# Altium PCB 917S001(ZHTH-010)-F.PcbDoc (part 2 of 2)
Units mm, origin at the board's own origin, x right, y up, seen from the top; angles counter-clockwise.
Board outline 77.5 x 39.1 mm, 2 copper layers (Top Layer, Bottom Layer), stack 0.325 mm thick; 174 components, 101 nets, 467 pads, 299 vias.
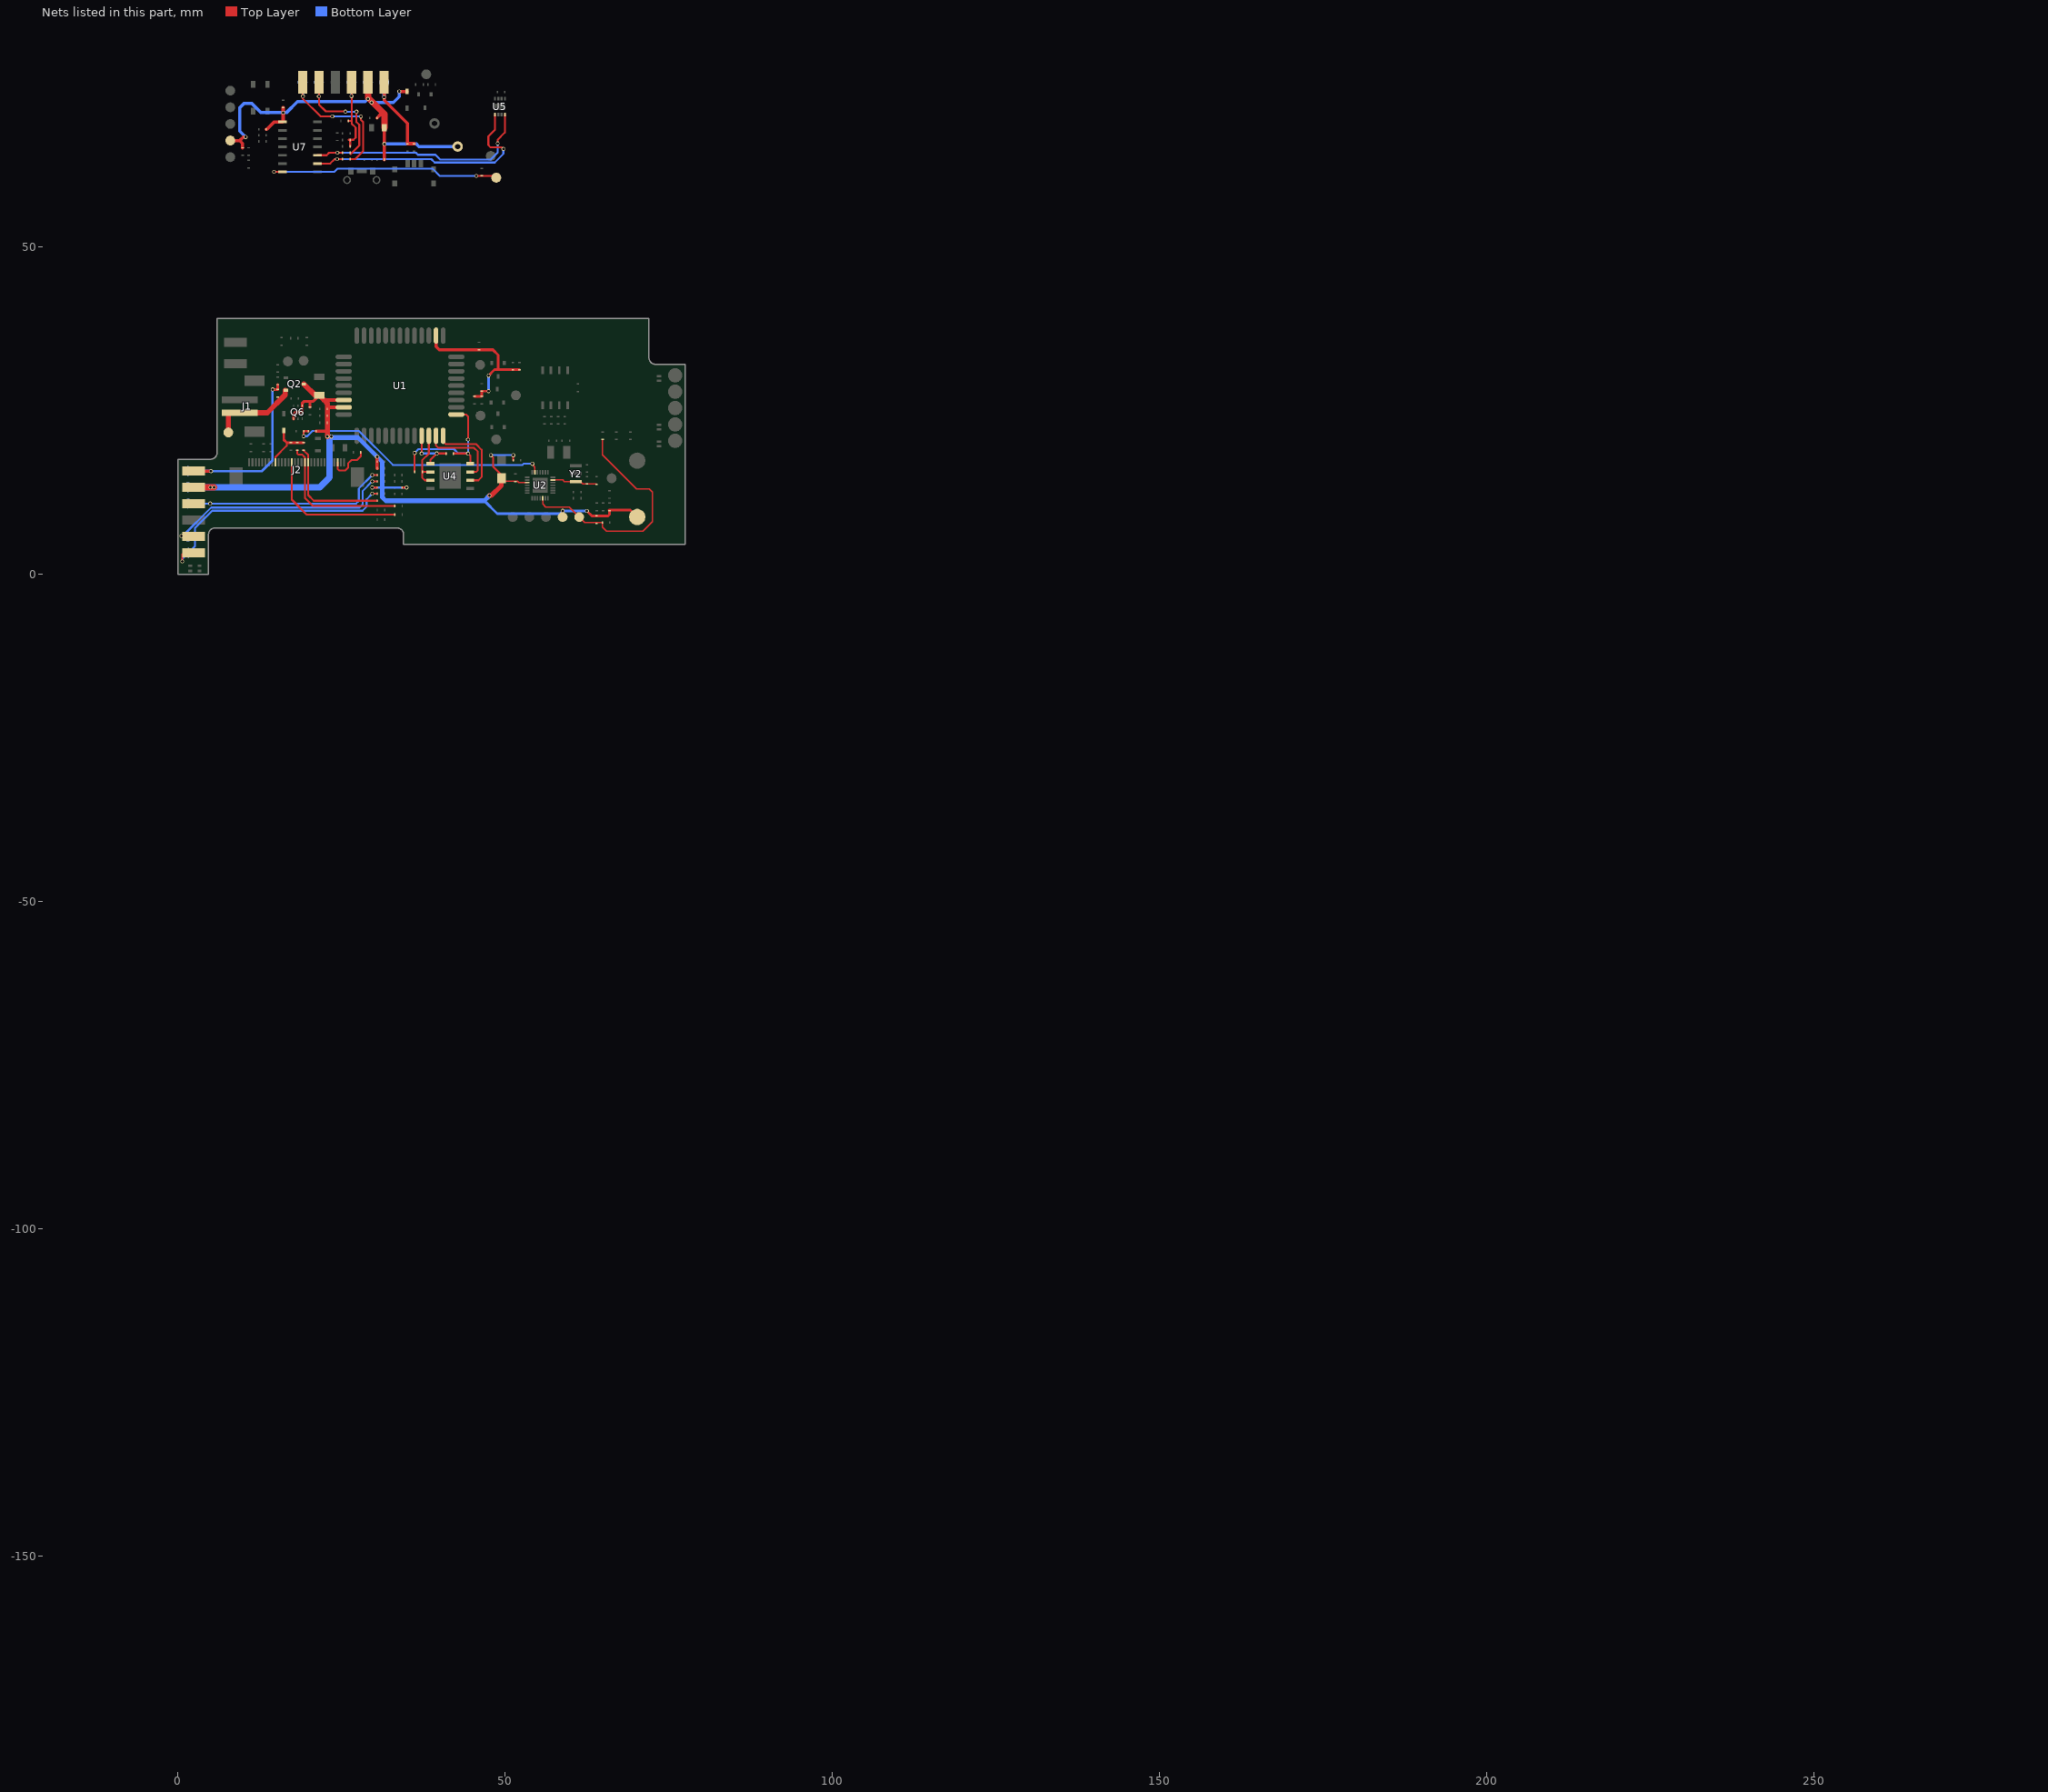
[diagram p2: the nets of this part, all layers, seen from the top]

## Via types
v1: diameter 0.6, hole 0.4, Top Layer to Bottom Layer, tented both sides, 299 vias

## Nets (pads, with @x,y where several pads share a name; then routed paths per layer and width w, separated by ;. In a path a pad name is that pad's centre, name@x,y a point inside that pad or via, vN(x,y) a via of type N, cw(c..) or ccw(c..) an arc to the next point about the centre after c; other vN are vias at no path point) (continued)
OLED_VDD: C12.2 D4.2 J2.22 R42.1 R43.1 | length 8.3
  Top Layer w0.3: J2.22@14.911,17.096 14.911,17.909 16.637,19.634 16.637,20.117
  Top Layer w0.4: D4.2@16.205,21.976 16.205,20.549 16.637,20.117 R43.1@19.202,20.117
OLED_VDD_EN: R7.1 R8.2 U2.13 | length 40.3
  Top Layer w0.2: v1@54.254,16.713 54.572,16.396 U2.13@54.572,15.564
  Top Layer w0.3: v1(19.228,21.107) 19.228,21.864 R8.2@19.233,21.869 R7.1@19.962,21.869
  Bottom Layer w0.3: v1(19.228,21.107) 19.787,21.107 20.599,21.92 27.661,21.92 32.858,16.723 52.664,16.723 52.832,16.891 v1(54.178,16.891)
R\E\S\: J2.17 R24.1 | length 22.4
  Top Layer w0.3: J2.17@17.411,17.096 17.411,11.418 19.71,9.119 R24.1@33.147,9.119
SCL: R23.1 U5.4 U7.10 | length 35.6
  Top Layer w0.3: U7.10@21.336,64.033 22.733,64.033 23.127,64.427 v1(24.384,64.427) R23.1@25.19,64.427 ; v1(48.882,65.837) 48.882,66.408 49.975,67.501 U5.4@49.975,70.225
  Bottom Layer w0.3: v1(24.384,64.427) 36.369,64.427 36.685,64.111 39.368,64.111 40.107,63.373 47.803,63.373 48.882,64.453 v1(48.882,65.837)
SCLK: J2.13 R17.1 R42.2 | length 22.3
  Top Layer w0.3: R42.2@18.237,18.976 18.237,18.466 18.39,18.313 18.974,18.313 19.411,17.876 J2.13@19.411,17.096 19.411,11.704 20.65,10.465 R17.1@33.147,10.465
SDA: R25.1 U5.1 U7.9 | length 38.7
  Top Layer w0.3: U7.9@21.336,62.763 23.292,62.763 23.978,63.449 v1(24.333,63.449) R25.1@25.19,63.449 ; U5.1@48.475,70.225 48.475,67.93 47.457,66.912 47.457,65.588 47.808,65.237 49.52,65.237 v1(49.759,64.999)
  Bottom Layer w0.3: v1(24.333,63.449) 38.735,63.449 39.261,62.923 48.42,62.923 49.759,64.262 v1(49.759,64.999)
SDIN: J2.12 R20.1 R43.2 | length 18.1
  Top Layer w0.3: R43.2@19.202,18.967 19.911,18.258 J2.12@19.911,17.096 19.911,12.118 20.777,11.252 R20.1@30.479,11.252
SHT31_VCC: R41.2 T27.1 U7.7 | length 36
  Top Layer w0.3: v1(14.707,61.493) U7.7@16.002,61.493 ; v1(45.618,60.884) R41.2@46.457,60.884 47.992,60.884 cw(c47.992,59.93) T27.1@48.666,60.604
  Bottom Layer w0.3: v1(14.707,61.493) 23.927,61.493 24.435,62.001 38.913,62.001 40.03,60.884 v1(45.618,60.884)
SHT_ALERT: P8.1 R37.1 T40.1 | length 31.8
  Top Layer w0.3: v1@29.737,15.183 R37.1@30.479,15.183
  Bottom Layer w0.3: T40.1@1.575,10.82 v1(4.953,10.82) 27.254,10.82 27.661,11.227 27.661,13.106 v1(29.718,15.164)
SHT_ALERT_S: P7.1 R40.2 R47.2 R48.2 T33.1 | length 13.1
  Top Layer w0.3: R40.2@26.067,69.291 26.521,69.291 ; 26.137,66.396 26.822,66.396 27.178,66.751 27.178,68.25 26.572,68.856 P7.1@26.572,75.159 ; R47.2@26.34,65.405 R48.2@26.34,66.192
  Bottom Layer w0.3: v1(26.543,73.076) T33.1@26.543,75.129
SHT_SCL: P4.1 R35.1 T32.1 | length 35.5
  Top Layer w0.3: P4.1@2.718,5.799 P4.1@3.64,5.799 ; v1@29.729,14.226 R35.1@30.479,14.226
  Bottom Layer w0.3: v1(0.533,5.867) 0.762,5.867 5.105,10.211 27.762,10.211 28.27,10.719 28.27,12.768 v1(29.718,14.216)
SHT_SCL_S: P3.1 R23.2 T34.1 | length 18.9
  Top Layer w0.3: P3.1@21.572,75.159 v1(21.572,73.025) 21.572,71.773 22.619,70.726 25.566,70.726 v1(25.603,70.688) ; 26.416,64.211 27.737,65.532 27.737,68.682 27.305,69.113 v1(27.305,70.688)
  Bottom Layer w0.3: v1(21.572,73.025) T34.1@21.572,75.159 ; v1(25.603,70.688) v1(27.305,70.688)
SHT_SDA: P2.1 R36.1 T36.1 | length 37.7
  Top Layer w0.3: v1(0.686,1.981) P2.1@0.686,3.073 ; v1@29.724,12.313 R36.1@30.479,12.313
  Bottom Layer w0.3: v1(0.686,1.981) 0.686,2.362 T36.1@1.626,3.302 2.616,4.293 2.616,7.085 5.259,9.728 28.219,9.728 28.854,10.363 28.854,11.455 v1(29.718,12.319)
SHT_SDA_S: P1.1 R25.2 T31.1 | length 22.5
  Top Layer w0.3: P1.1@19.072,75.159 19.072,72.717 21.814,69.976 v1(23.618,69.976) ; R25.2@26.34,63.449 27.127,63.449 28.321,64.643 28.321,69.088 27.965,69.444 v1(27.965,69.952)
  Bottom Layer w0.3: v1(19.126,73.05) T31.1@19.126,75.105 ; v1(23.618,69.976) 27.941,69.976 v1(27.965,69.952)
SIM_GND: C34.2 U1.10 U4.1 | length 8.4
  Top Layer w0.3: v1(37.262,18.466) U1.10@37.262,21.177 ; U4.1@38.608,16.916 38.608,17.501 v1(39.573,18.466) C34.2@40.989,18.466
  Bottom Layer w0.3: v1(37.262,18.466) v1(39.573,18.466)
TEM_OUT: C38.1 R59.1 U2.6 Y2.1 | length 6.9
  Top Layer w0.2: U2.6@57.322,14.414 58.839,14.414 59.081,14.173 Y2.1@60.845,14.173 61.494,14.173 61.874,13.792 C38.1@62.535,13.792 R59.1@63.966,13.792
USIM_CLK: U1.13 U4.6 | length 13.4
  Top Layer w0.3: U1.13@40.56,21.179 40.56,20.273 40.919,19.914 45.542,19.914 46.431,19.025 46.431,14.884 45.923,14.376 U4.6@44.704,14.376
USIM_DATA: R34.1 U1.11 U4.2 U4.3 | length 9.5
  Top Layer w0.3: R34.1@37.363,15.646 U4.2@38.608,15.646 ; U1.11@38.36,21.179 38.36,18.446 37.338,17.424 37.338,14.808 37.77,14.376 U4.3@38.608,14.376
USIM_RST: U1.12 U4.7 | length 12.4
  Top Layer w0.3: U1.12@39.46,21.179 39.46,19.671 39.802,19.329 45.263,19.329 45.847,18.745 45.847,15.9 45.593,15.646 U4.7@44.704,15.646
USIM_VDD: C34.1 R34.2 U1.14 U4.8 | length 23
  Top Layer w0.3: R34.2@36.195,15.646 v1(36.195,18.542) ; C34.1@42.139,18.466 v1(44.348,18.466) 44.704,18.11 U4.8@44.704,16.916 ; U1.14@42.56,24.429 44.049,24.429 44.348,24.13 v1(44.348,20.599)
  Bottom Layer w0.3: v1(36.195,18.542) 36.779,19.126 42.215,19.126 42.875,18.466 v1(44.348,18.466) v1(44.348,20.599)
VBAT: C1.1 C3.1 C4.1 C5.1 C14.2 C15.1 C16.1 C35.1 P10.1 Q2.D Q6.1 Q6.4 R2.2 R5.2 R7.2 R11.2 R19.1 R32.1 R33.1 T1.1 T25.1 T44.1 U1.42 U1.43 U2.17 | length 138.8
  Top Layer w0.2: C15.1@49.784,14.249 51.9,14.249 52.135,14.014 U2.17@53.422,14.014
  Top Layer w0.3: v1@29.72,13.269 R32.1@30.479,13.269 ; R33.1@34.29,13.258 v1(34.95,13.259) ; v1(47.854,18.212) 48.209,17.856 48.209,16.434 49.479,15.164 C15.1@49.479,14.707 ; R19.1@51.257,17.424 v1(51.257,18.212)
  Top Layer w0.4: T44.1@58.801,8.213 v1(58.801,9.703) ; v1(62.509,9.677) 63.239,8.948 R5.2@63.983,8.948 65.768,8.948 65.964,9.144 R2.2@65.964,9.754 ; R2.2@65.913,9.83 69.139,9.83 T25.1@70.206,8.763
  Top Layer w0.45: Q6.4@17.705,23.768 17.705,24.487 17.958,24.74 18.771,24.74 19.005,24.974 Q6.1@19.005,25.768 19.005,26.117 19.329,26.441 20.193,26.441 ; R11.2@20.193,25.534 20.193,26.441 ; C1.1@21.615,27.356 20.701,26.441 20.193,26.441
  Top Layer w0.5: R7.2@21.112,21.869 22.606,21.869 ; v1(30.455,17.958) 30.455,16.224 C14.2@30.473,16.205
  Top Layer w0.6: 22.342,26.629 U1.42@25.36,26.629 ; 22.887,25.529 U1.43@25.36,25.529
  Top Layer w0.7: v1(47.625,12.04) 47.904,12.04 49.454,13.589 C15.1@49.454,14.707
  Top Layer w0.8: Q2.D@19.267,29.073 20.984,27.356 C1.1@21.615,27.356 22.342,26.629 22.86,26.111 v1(22.86,21.066)
  Top Layer w1: P10.1@2.718,13.299 5.526,13.299 v1(5.537,13.31)
  Bottom Layer w0.3: v1(29.718,13.267) 31.267,13.267 v1@34.942,13.267 ; v1(47.854,18.212) v1(51.257,18.212)
  Bottom Layer w0.4: 46.838,11.252 48.808,9.281 58.38,9.281 v1(58.801,9.703) 62.484,9.703 v1(62.509,9.677)
  Bottom Layer w0.7: 23.19,20.904 27.508,20.904 31.267,17.145 31.267,13.267 31.267,11.76 31.775,11.252 46.838,11.252 v1(47.625,12.04)
  Bottom Layer w1: T1.1@1.549,13.31 v1(4.978,13.31) 21.692,13.31 23.19,14.808 23.19,20.904
  other v1: 23.47,21.066
VBAT_CTL: P12.1 R49.1 R51.1 T8.1 | length 28.3
  Top Layer w0.4: v1(14.503,28.245) 15.272,28.245 R49.1@15.291,28.263 R51.1@15.291,28.996
  Top Layer w0.5: P12.1@2.718,15.799 2.921,15.799 2.946,15.773 v1(5.08,15.773)
  Bottom Layer w0.4: v1(5.08,15.773) 12.827,15.773 14.464,17.41 14.464,28.205 v1(14.503,28.245)
  Bottom Layer w0.5: T8.1@1.575,15.773 v1(5.08,15.773)
VBAT_CTL_S: C13.2 P11.1 R52.2 T43.1 | length 14.1
  Top Layer w0.5: P11.1@31.547,75.184 31.547,72.441 35.102,68.886 C13.2@35.102,65.799 R52.2@36.113,65.799
  Bottom Layer w0.5: v1(31.521,72.923) T43.1@31.521,75.159
VBAT_IN: J1.2 Q2.S R49.2 T42.1 | length 13.4
  Top Layer w0.8: T42.1@7.722,21.692 7.722,24.46 7.941,24.679 J1.2@9.474,24.679 13.656,24.679 16.408,27.432 Q2.S@16.408,28.123
VBAT_S: C20.1 C33.1 C45.1 D2.2 LS1.1 P9.1 R14.1 R31.1 R38.1 T21.1 T41.1 U7.1 | length 70.4
  Top Layer w0.5: T41.1@8.026,66.279 9.463,66.279 ; R14.1@9.906,65.176 9.906,65.837 9.463,66.279 ; v1(10.363,66.827) 10.011,66.827 9.463,66.279 ; R31.1@13.525,67.998 13.591,67.998 14.707,69.113 U7.1@16.002,69.113 ; U7.1@16.104,69.215 v1(16.104,70.536) C45.1@16.104,71.298 ; C20.1@30.455,69.723 31.039,70.307 31.572,70.307 ; R38.1@31.572,63.373 C33.1@31.572,68.224 ; v1(33.853,73.782) D2.2@35.001,73.782
  Top Layer w1: P9.1@29.072,75.159 29.072,72.807 31.572,70.307 C33.1@31.572,68.224
  Bottom Layer w0.5: v1(10.363,66.827) 9.474,67.716 9.474,71.298 10.135,71.958 11.303,71.958 12.725,70.536 v1(16.104,70.536) 16.586,70.536 18.276,72.226 28.639,72.226 v1(29.058,72.644) ; T21.1@29.058,75.159 v1(29.058,72.644) ; v1(31.572,65.761) 36.45,65.761 36.846,65.364 LS1.1@42.763,65.364 ; v1(33.853,73.782) 33.853,72.994 32.944,72.085 v1(29.616,72.085) v1(29.058,72.644)
VCC: C10.1 J2.3 | length 6.5
  Top Layer w0.3: J2.3@24.411,17.096 24.411,16.127 24.663,15.875 25.603,15.875 26.01,16.281 26.01,16.942 26.518,17.45 27.356,17.45 27.965,18.059 C10.1@27.965,18.644
VDD_EXT: C17.2 C18.2 C19.2 R9.2 R10.1 R22.2 U1.24 | length 24.4
  Top Layer w0.4: C18.2@45.314,27.21 R9.2@46.457,27.21 R22.2@46.457,27.984 v1(47.491,27.984) ; v1(47.491,30.36) 48.398,31.267 48.946,31.267 ; 48.158,34.315 48.946,33.528 48.946,31.267 ; C19.2@52.222,31.267 48.946,31.267
  Top Layer w0.5: U1.24@39.46,36.479 39.46,34.81 39.954,34.315 48.158,34.315
  Bottom Layer w0.4: v1(47.491,27.984) v1(47.491,30.36)
VPP: C8.1 R5.1 R56.1 T4.1 U2.26 | length 37.2
  Top Layer w0.2: U2.26@55.772,11.664 55.772,10.751 56.21,10.312 59.792,10.312 T4.1@61.341,8.763 62.179,7.925 C8.1@64.872,7.925 64.872,7.239 65.481,6.629 71.069,6.629 72.517,8.077 72.517,12.598 72.034,13.081 70.129,13.081 64.922,18.288 R56.1@64.922,20.609
pads on no net: J2.6 J2.7 J2.8 J2.9 J2.10 J2.11 J2.14 J2.15 J2.19 J2.24 K1. K2.3 K2.4 K2.5 S1.0 S1.3 T544.1 U1.2 U1.3 U1.4 U1.5 U1.6 U1.7 U1.8 U1.9 U1.16 U1.19 U1.21 U1.22 U1.23 U1.25 U1.26 U1.28 U1.29 U1.30 U1.31 U1.32 U1.33 U1.44 U1.45 U1.46 U1.47 U1.48 U1.49 U1.50 U1.51 U1.52 U1.53 U1.54 U1.55 U1.56 U1.57 U1.58 U2.4 U3. U4.0 U4.4 U4.5 U5.6 U7.
copper on no net: | length 1
  Top Layer w0.254: 51.181,8.763 51.333,8.763 51.41,8.763 ; 51.486,8.179 51.486,8.865 ; 54.026,8.458 54.077,8.458

## Polygon pours and split planes (outlines as drawn)
GND on Top Layer "Bottom Layer-No Net" (solid, remove dead copper, pour order 48): 0.025,0 -0.305,0.33 -0.305,35.992 0.279,35.992 4.826,40.538 6.833,42.545 73.533,42.545 75.336,42.545 83.007,34.874 81.788,33.655 81.788,-1.118
GND_S on Top Layer "Bottom Layer-No Net" (solid, remove dead copper, pour order 26): 3.124,77.924 3.124,63.424 5.624,63.424 5.624,59.424 40.589,59.424 40.411,59.424 40.194,59.641 40.194,67.424 40.194,74.424 40.157,74.461 40.157,77.978
GND on Bottom Layer "Bottom Layer-No Net" (solid, remove dead copper, pour order 46): 0.229,0.025 0.457,0.254 4.597,0.254 4.597,4.826 6.071,6.299 7.899,4.47 34.773,4.47 77.343,4.47 77.572,4.699 77.876,5.004 77.876,37.871 73.838,37.871 72.619,39.091 72.492,38.964 5.766,38.964 5.766,23.419 -0.051,17.602
GND_S on Bottom Layer "Bottom Layer-No Net" (solid, remove dead copper, pour order 28): 3.124,77.924 3.124,63.424 5.624,63.424 5.624,59.424 40.157,59.424 40.157,67.476 40.194,67.513 40.208,67.527 40.208,77.924

## Keep-outs
Keep-Out Layer:
  circle w0.006: c-15.334,0 r0.003
  circle w0.006: c0,0 r0.003
  circle w0.006: c6,39.1 r0.003
  circle w0.006: c85.568,39.1 r0.003
  circle w0.006: c72,39.1 r0.003
  circle w0.006: c77.5,4.6 r0.003
  circle w0.013: c76,30.4 r1.1
  circle w0.013: c76,27.9 r1.1
  circle w0.013: c76,25.4 r1.1
  circle w0.013: c76,22.9 r1.1
  circle w0.013: c76,20.4 r1.1
  circle w0.006: c4.7,-10.517 r0.003
  circle w0.006: c4.7,0 r0.003
  circle w0.006: c0,0 r0.003
  circle w0.006: c77.5,-20.328 r0.003
  circle w0.006: c77.5,4.6 r0.003
  circle w0.006: c0,0 r0.003
  circle w0.013: c34.3,18.55 r0.7
  circle w0.013: c44.4,37.1 r0.7
  circle w0.006: c6,48.24 r0.003
  circle w0.006: c6,39.1 r0.003
  circle w0.006: c72,39.1 r0.003
  circle w0.006: c246.233,-118.082 r0.003
  circle w0.006: c180.233,-118.082 r0.003
  circle w0.006: c180.233,-108.943 r0.003
  circle w0.013: c186.133,-130.482 r0.71
  circle w0.013: c186.133,-132.482 r0.71
  circle w0.013: c218.633,-120.082 r0.7
  circle w0.013: c208.533,-138.632 r0.7
  circle w0.006: c174.233,-157.182 r0.003
  circle w0.006: c251.733,-152.582 r0.003
  circle w0.006: c251.733,-177.511 r0.003
  circle w0.006: c174.233,-157.182 r0.003
  circle w0.006: c178.933,-157.182 r0.003
  circle w0.006: c178.933,-167.7 r0.003
  circle w0.013: c250.233,-136.782 r1.1
  circle w0.013: c250.233,-134.282 r1.1
  circle w0.013: c250.233,-131.782 r1.1
  circle w0.013: c250.233,-129.282 r1.1
  circle w0.013: c250.233,-126.782 r1.1
  circle w0.006: c251.733,-152.582 r0.003
  circle w0.006: c246.233,-118.082 r0.003
  circle w0.006: c259.802,-118.082 r0.003
  circle w0.006: c180.233,-118.082 r0.003
  circle w0.006: c174.233,-157.182 r0.003
  circle w0.006: c158.9,-157.182 r0.003
  circle w0.006: c265.791,-77.417 r0.003
  circle w0.006: c199.791,-77.417 r0.003
  circle w0.006: c199.791,-68.277 r0.003
  circle w0.013: c205.691,-89.817 r0.71
  circle w0.013: c205.691,-91.817 r0.71
  circle w0.013: c238.191,-79.417 r0.7
  circle w0.013: c228.091,-97.967 r0.7
  circle w0.006: c193.791,-116.517 r0.003
  circle w0.006: c271.291,-111.917 r0.003
  circle w0.006: c271.291,-136.845 r0.003
  circle w0.006: c193.791,-116.517 r0.003
  circle w0.006: c198.491,-116.517 r0.003
  circle w0.006: c198.491,-127.034 r0.003
  circle w0.013: c269.791,-96.117 r1.1
  circle w0.013: c269.791,-93.617 r1.1
  circle w0.013: c269.791,-91.117 r1.1
  circle w0.013: c269.791,-88.617 r1.1
  circle w0.013: c269.791,-86.117 r1.1
  circle w0.006: c271.291,-111.917 r0.003
  circle w0.006: c265.791,-77.417 r0.003
  circle w0.006: c279.36,-77.417 r0.003
  circle w0.006: c199.791,-77.417 r0.003
  circle w0.006: c193.791,-116.517 r0.003
  circle w0.006: c178.458,-116.517 r0.003
  region: -15.334,0 -15.5,1 -15.167,1
  region: -15.167,38.1 -15.5,38.1 -15.334,39.1
  region: 85.735,38.1 85.402,38.1 85.568,39.1
  region: -2.824,27.841 -2.99,28.841 -2.657,28.841
  region: 1,-10.684 0,-10.517 1,-10.351
  region: 4.7,-10.517 3.7,-10.684 3.7,-10.351
  region: 77.5,-20.328 76.5,-20.495 76.5,-20.162
  region: 1,-20.495 0,-20.328 1,-20.162
  region: 7,48.073 6,48.24 7,48.406
  region: 72,48.24 71,48.073 71,48.406
  region: 4,33.1 3.374,33.344 3.525,33.641
  region: 178.233,-124.082 177.608,-123.838 177.758,-123.541
  region: 246.233,-108.943 245.233,-109.109 245.233,-108.776
  region: 181.233,-109.109 180.233,-108.943 181.233,-108.776
  region: 175.233,-177.677 174.233,-177.511 175.233,-177.344
  region: 251.733,-177.511 250.733,-177.677 250.733,-177.344
  region: 178.933,-167.7 177.933,-167.866 177.933,-167.533
  region: 175.233,-167.866 174.233,-167.7 175.233,-167.533
  region: 259.802,-152.582 259.635,-151.582 259.968,-151.582
  region: 259.968,-119.082 259.635,-119.082 259.802,-118.082
  region: 159.066,-119.082 158.733,-119.082 158.9,-118.082
  region: 158.9,-157.182 158.733,-156.182 159.066,-156.182
  region: 197.791,-83.417 197.166,-83.173 197.316,-82.876
  region: 265.791,-68.277 264.791,-68.444 264.791,-68.111
  region: 200.791,-68.444 199.791,-68.277 200.791,-68.111
  region: 194.791,-137.012 193.791,-136.845 194.791,-136.679
  region: 271.291,-136.845 270.291,-137.012 270.291,-136.679
  region: 198.491,-127.034 197.491,-127.201 197.491,-126.868
  region: 194.791,-127.201 193.791,-127.034 194.791,-126.868
  region: 279.36,-111.917 279.193,-110.917 279.526,-110.917
  region: 279.526,-78.417 279.193,-78.417 279.36,-77.417
  region: 178.624,-78.417 178.291,-78.417 178.458,-77.417
  region: 178.458,-116.517 178.291,-115.517 178.624,-115.517
  lines w0.013: -15.834,0 -0.8,0 ; -15.834,39.1 5.2,39.1 ; -15.334,1 -15.334,15.926 ; -15.334,21.973 -15.334,38.1 ; -10.092,27.841 -2.324,27.841 ; -7.153,41.579 3.45,33.493 ; -2.951,-10.517 0,-10.517 ; 0,-20.828 0,-0.8 0,-11.017 ; 1,-20.328 36.956,-20.328 ; 1,-10.517 3.7,-10.517 ; 4.7,-11.017 4.7,-0.8 ; 5.65,1.1 30.35,1.1 ; 6,32.65 4.45,32.65 ; 6,33.55 4.45,33.55 ; 6,36.15 4.45,36.15 ; 6,37.05 4.45,37.05 ; 6,39.9 6,48.74 ; 7,32.35 6,32.35 6,33.85 7,33.85 ; 7,32.439 10.5,32.439 ; 7,33.761 10.5,33.761 ; 7,35.85 6,35.85 6,37.35 7,37.35 ; 7,35.939 10.5,35.939 ; 7,37.261 10.5,37.261 ; 7,48.24 20.505,48.24 ; 13,3.45 13,4.45 23,4.45 23,3.45 ; 26.505,48.24 71,48.24 ; 32.969,18.55 35.631,18.55 ; 34.3,17.375 34.3,19.725 ; 43.004,-20.328 76.5,-20.328 ; 43.069,37.1 45.731,37.1 ; 44.4,35.925 44.4,38.275 ; 72,39.9 72,48.74 ; 72.8,39.1 86.068,39.1 ; 74.669,20.4 77.331,20.4 ; 74.669,22.9 77.331,22.9 ; 74.669,25.4 77.331,25.4 ; 74.669,27.9 77.331,27.9 ; 74.669,30.4 77.331,30.4 ; 76,19.225 76,21.575 ; 76,21.725 76,24.075 ; 76,24.225 76,26.575 ; 76,26.725 76,29.075 ; 76,29.225 76,31.575 ; 77.5,-20.828 77.5,3.8 ; 85.568,5.6 85.568,23.832 ; 85.568,29.879 85.568,38.1 ; 158.4,-157.182 173.433,-157.182 ; 158.4,-118.082 179.433,-118.082 ; 158.9,-156.182 158.9,-141.257 ; 158.9,-135.209 158.9,-119.082 ; 167.08,-115.603 177.683,-123.69 ; 171.282,-167.7 174.233,-167.7 ; 173.933,-154.332 172.383,-154.332 ; 173.933,-153.432 172.383,-153.432 ; 173.933,-151.832 172.383,-151.832 ; 173.933,-150.932 172.383,-150.932 ; 173.933,-149.332 172.383,-149.332 ; 173.933,-148.432 172.383,-148.432 ; 173.933,-146.832 172.383,-146.832 ; 173.933,-145.932 172.383,-145.932 ; 173.933,-144.332 172.383,-144.332 ; 173.933,-143.432 172.383,-143.432 ; 173.933,-141.832 172.383,-141.832 ; 173.933,-140.932 172.383,-140.932 ; 174.233,-178.011 174.233,-157.982 174.233,-168.2 ; 174.933,-154.632 173.933,-154.632 173.933,-153.132 174.933,-153.132 ; 174.933,-154.544 178.433,-154.544 ; 174.933,-153.221 178.433,-153.221 ; 174.933,-152.132 173.933,-152.132 173.933,-150.632 174.933,-150.632 ; 174.933,-152.044 178.433,-152.044 ; 174.933,-150.721 178.433,-150.721 ; 174.933,-149.632 173.933,-149.632 173.933,-148.132 174.933,-148.132 ; 174.933,-149.544 178.433,-149.544 ; 174.933,-148.221 178.433,-148.221 ; 174.933,-147.132 173.933,-147.132 173.933,-145.632 174.933,-145.632 ; 174.933,-147.044 178.433,-147.044 ; 174.933,-145.721 178.433,-145.721 ; 174.933,-144.632 173.933,-144.632 173.933,-143.132 174.933,-143.132 ; 174.933,-144.544 178.433,-144.544 ; 174.933,-143.221 178.433,-143.221 ; 174.933,-142.132 173.933,-142.132 173.933,-140.632 174.933,-140.632 ; 174.933,-142.044 178.433,-142.044 ; 174.933,-140.721 178.433,-140.721 ; 175.233,-177.511 211.19,-177.511 ; 175.233,-167.7 177.933,-167.7 ; 177.958,-116.517 192.991,-116.517 ; 177.958,-77.417 198.991,-77.417 ; 178.458,-115.517 178.458,-100.591 ; 178.458,-94.544 178.458,-78.417 ; 178.933,-168.2 178.933,-157.982 ; 179.883,-156.082 204.583,-156.082 ; 180.233,-124.532 178.683,-124.532 ; 180.233,-123.632 178.683,-123.632 ; 180.233,-121.032 178.683,-121.032 ; 180.233,-120.132 178.683,-120.132 ; 180.233,-117.282 180.233,-108.443 ; 181.233,-124.832 180.233,-124.832 180.233,-123.332 181.233,-123.332 ; 181.233,-124.744 184.733,-124.744 ; 181.233,-123.421 184.733,-123.421 ; 181.233,-121.332 180.233,-121.332 180.233,-119.832 181.233,-119.832 ; 181.233,-121.244 184.733,-121.244 ; 181.233,-119.921 184.733,-119.921 ; 181.233,-108.943 194.738,-108.943 ; 183.033,-132.732 181.433,-132.732 ; 183.033,-132.232 181.433,-132.232 ; 183.033,-130.732 181.433,-130.732 ; 183.033,-130.232 181.433,-130.232 ; 184.333,-134.982 184.333,-134.782 ; 184.333,-134.932 187.133,-134.932 ; 184.333,-128.182 184.333,-127.982 ; 184.333,-128.032 187.133,-128.032 ; 185.033,-135.482 185.033,-134.982 184.233,-134.982 184.233,-134.782 187.233,-134.782 187.233,-134.982 186.433,-134.982 186.433,-135.482 ; 185.033,-127.482 185.033,-127.982 184.233,-127.982 184.233,-128.182 187.233,-128.182 187.233,-127.982 186.433,-127.982 186.433,-127.482 ; 186.638,-74.938 197.241,-83.024 ; 187.133,-134.982 187.133,-134.782 ; 187.133,-128.182 187.133,-127.982 ; 187.233,-153.732 187.233,-152.732 197.233,-152.732 197.233,-153.732 ; 187.233,-133.982 187.633,-133.982 187.633,-131.882 188.433,-131.882 ; 187.233,-128.982 187.633,-128.982 187.633,-131.082 188.433,-131.082 ; 190.84,-127.034 193.791,-127.034 ; 193.491,-113.667 191.941,-113.667 ; 193.491,-112.767 191.941,-112.767 ; 193.491,-111.167 191.941,-111.167 ; 193.491,-110.267 191.941,-110.267 ; 193.491,-108.667 191.941,-108.667 ; 193.491,-107.767 191.941,-107.767 ; 193.491,-106.167 191.941,-106.167 ; 193.491,-105.267 191.941,-105.267 ; 193.491,-103.667 191.941,-103.667 ; 193.491,-102.767 191.941,-102.767 ; 193.491,-101.167 191.941,-101.167 ; 193.491,-100.267 191.941,-100.267 ; 193.791,-137.345 193.791,-117.317 193.791,-127.534 ; 194.491,-113.967 193.491,-113.967 193.491,-112.467 194.491,-112.467 ; 194.491,-113.878 197.991,-113.878 ; 194.491,-112.555 197.991,-112.555 ; 194.491,-111.467 193.491,-111.467 193.491,-109.967 194.491,-109.967 ; 194.491,-111.378 197.991,-111.378 ; 194.491,-110.055 197.991,-110.055 ; 194.491,-108.967 193.491,-108.967 193.491,-107.467 194.491,-107.467 ; 194.491,-108.878 197.991,-108.878 ; 194.491,-107.555 197.991,-107.555 ; 194.491,-106.467 193.491,-106.467 193.491,-104.967 194.491,-104.967 ; 194.491,-106.378 197.991,-106.378 ; 194.491,-105.055 197.991,-105.055 ; 194.491,-103.967 193.491,-103.967 193.491,-102.467 194.491,-102.467 ; 194.491,-103.878 197.991,-103.878 ; 194.491,-102.555 197.991,-102.555 ; 194.491,-101.467 193.491,-101.467 193.491,-99.967 194.491,-99.967 ; 194.491,-101.378 197.991,-101.378 ; 194.491,-100.055 197.991,-100.055 ; 194.791,-136.845 230.748,-136.845 ; 194.791,-127.034 197.491,-127.034 ; 198.491,-127.534 198.491,-117.317 ; 199.441,-115.417 224.141,-115.417 ; 199.791,-83.867 198.241,-83.867 ; 199.791,-82.967 198.241,-82.967 ; 199.791,-80.367 198.241,-80.367 ; 199.791,-79.467 198.241,-79.467 ; 199.791,-76.617 199.791,-67.777 ; 200.738,-108.943 245.233,-108.943 ; 200.791,-84.167 199.791,-84.167 199.791,-82.667 200.791,-82.667 ; 200.791,-84.078 204.291,-84.078 ; 200.791,-82.755 204.291,-82.755 ; 200.791,-80.667 199.791,-80.667 199.791,-79.167 200.791,-79.167 ; 200.791,-80.578 204.291,-80.578 ; 200.791,-79.255 204.291,-79.255 ; 200.791,-68.277 214.296,-68.277 ; 202.591,-92.067 200.991,-92.067 ; 202.591,-91.567 200.991,-91.567 ; 202.591,-90.067 200.991,-90.067 ; 202.591,-89.567 200.991,-89.567 ; 203.891,-94.317 203.891,-94.117 ; 203.891,-94.267 206.691,-94.267 ; 203.891,-87.517 203.891,-87.317 ; 203.891,-87.367 206.691,-87.367 ; 204.591,-94.817 204.591,-94.317 203.791,-94.317 203.791,-94.117 206.791,-94.117 206.791,-94.317 205.991,-94.317 205.991,-94.817 ; 204.591,-86.817 204.591,-87.317 203.791,-87.317 203.791,-87.517 206.791,-87.517 206.791,-87.317 205.991,-87.317 205.991,-86.817 ; 206.691,-94.317 206.691,-94.117 ; 206.691,-87.517 206.691,-87.317 ; 206.791,-113.067 206.791,-112.067 216.791,-112.067 216.791,-113.067 ; 206.791,-93.317 207.191,-93.317 207.191,-91.217 207.991,-91.217 ; 206.791,-88.317 207.191,-88.317 207.191,-90.417 207.991,-90.417 ; 207.202,-138.632 209.865,-138.632 ; 208.533,-139.808 208.533,-137.457 ; 217.237,-177.511 250.733,-177.511 ; 217.302,-120.082 219.965,-120.082 ; 218.633,-121.258 218.633,-118.907 ; 220.296,-68.277 264.791,-68.277 ; 226.76,-97.967 229.423,-97.967 ; 228.091,-99.142 228.091,-96.791 ; 236.795,-136.845 270.291,-136.845 ; 236.86,-79.417 239.523,-79.417 ; 237.408,-123.082 237.408,-122.582 237.558,-122.582 237.558,-123.082 ; 237.908,-123.082 237.908,-122.582 238.058,-122.582 238.058,-123.082 ; 238.191,-80.592 238.191,-78.241 ; 238.408,-123.082 238.408,-122.582 238.558,-122.582 238.558,-123.082 ; 238.908,-123.082 238.908,-122.582 239.058,-122.582 239.058,-123.082 ; 239.408,-123.082 239.408,-122.582 239.558,-122.582 239.558,-123.082 ; 239.908,-123.082 239.908,-122.582 240.058,-122.582 240.058,-123.082 ; 240.408,-123.082 240.408,-122.582 240.558,-122.582 240.558,-123.082 ; 246.233,-117.282 246.233,-108.443 ; 247.033,-118.082 260.302,-118.082 ; 248.902,-136.782 251.565,-136.782 ; 248.902,-134.282 251.565,-134.282 ; 248.902,-131.782 251.565,-131.782 ; 248.902,-129.282 251.565,-129.282 ; 248.902,-126.782 251.565,-126.782 ; 250.233,-137.958 250.233,-135.607 ; 250.233,-135.458 250.233,-133.107 ; 250.233,-132.958 250.233,-130.607 ; 250.233,-130.458 250.233,-128.107 ; 250.233,-127.958 250.233,-125.607 ; 251.733,-178.011 251.733,-153.382 ; 252.533,-152.582 260.302,-152.582 ; 256.966,-82.417 256.966,-81.917 257.116,-81.917 257.116,-82.417 ; 257.466,-82.417 257.466,-81.917 257.616,-81.917 257.616,-82.417 ; 257.966,-82.417 257.966,-81.917 258.116,-81.917 258.116,-82.417 ; 258.466,-82.417 258.466,-81.917 258.616,-81.917 258.616,-82.417 ; 258.966,-82.417 258.966,-81.917 259.116,-81.917 259.116,-82.417 ; 259.466,-82.417 259.466,-81.917 259.616,-81.917 259.616,-82.417 ; 259.802,-151.582 259.802,-133.351 ; 259.802,-127.303 259.802,-119.082 ; 259.966,-82.417 259.966,-81.917 260.116,-81.917 260.116,-82.417 ; 265.791,-76.617 265.791,-67.777 ; 266.591,-77.417 279.86,-77.417 ; 268.46,-96.117 271.123,-96.117 ; 268.46,-93.617 271.123,-93.617 ; 268.46,-91.117 271.123,-91.117 ; 268.46,-88.617 271.123,-88.617 ; 268.46,-86.117 271.123,-86.117 ; 269.791,-97.292 269.791,-94.941 ; 269.791,-94.792 269.791,-92.441 ; 269.791,-92.292 269.791,-89.941 ; 269.791,-89.792 269.791,-87.441 ; 269.791,-87.292 269.791,-84.941 ; 271.291,-137.345 271.291,-112.717 ; 272.091,-111.917 279.86,-111.917 ; 279.36,-110.917 279.36,-92.685 ; 279.36,-86.638 279.36,-78.417 ; 4.45,32.65 cw(c4.45,33.1) 4.45,33.55 ; 4.45,32.65 4.45,33.55 ; 4.45,36.15 cw(c4.45,36.6) 4.45,37.05 ; 4.45,36.15 4.45,37.05 ; 172.383,-154.332 cw(c172.383,-153.882) 172.383,-153.432 ; 172.383,-154.332 172.383,-153.432 ; 172.383,-151.832 cw(c172.383,-151.382) 172.383,-150.932 ; 172.383,-151.832 172.383,-150.932 ; 172.383,-149.332 cw(c172.383,-148.882) 172.383,-148.432 ; 172.383,-149.332 172.383,-148.432 ; 172.383,-146.832 cw(c172.383,-146.382) 172.383,-145.932 ; 172.383,-146.832 172.383,-145.932 ; 172.383,-144.332 cw(c172.383,-143.882) 172.383,-143.432 ; 172.383,-144.332 172.383,-143.432 ; 172.383,-141.832 cw(c172.383,-141.382) 172.383,-140.932 ; 172.383,-141.832 172.383,-140.932 ; 178.683,-124.532 cw(c178.683,-124.082) 178.683,-123.632 ; 178.683,-124.532 178.683,-123.632 ; 178.683,-121.032 cw(c178.683,-120.582) 178.683,-120.132 ; 178.683,-121.032 178.683,-120.132 ; 181.433,-132.732 181.433,-132.232 ; 181.433,-132.732 181.033,-132.632 181.033,-132.332 181.433,-132.232 ; 181.433,-130.732 181.433,-130.232 ; 181.433,-130.732 181.033,-130.632 181.033,-130.332 181.433,-130.232 ; 191.941,-113.667 cw(c191.941,-113.217) 191.941,-112.767 ; 191.941,-113.667 191.941,-112.767 ; 191.941,-111.167 cw(c191.941,-110.717) 191.941,-110.267 ; 191.941,-111.167 191.941,-110.267 ; 191.941,-108.667 cw(c191.941,-108.217) 191.941,-107.767 ; 191.941,-108.667 191.941,-107.767 ; 191.941,-106.167 cw(c191.941,-105.717) 191.941,-105.267 ; 191.941,-106.167 191.941,-105.267 ; 191.941,-103.667 cw(c191.941,-103.217) 191.941,-102.767 ; 191.941,-103.667 191.941,-102.767 ; 191.941,-101.167 cw(c191.941,-100.717) 191.941,-100.267 ; 191.941,-101.167 191.941,-100.267 ; 198.241,-83.867 cw(c198.241,-83.417) 198.241,-82.967 ; 198.241,-83.867 198.241,-82.967 ; 198.241,-80.367 cw(c198.241,-79.917) 198.241,-79.467 ; 198.241,-80.367 198.241,-79.467 ; 200.991,-92.067 200.991,-91.567 ; 200.991,-92.067 200.591,-91.967 200.591,-91.667 200.991,-91.567 ; 200.991,-90.067 200.991,-89.567 ; 200.991,-90.067 200.591,-89.967 200.591,-89.667 200.991,-89.567 ; 0,0 4.7,0 4.7,6.1 cw(c5.7,6.1) 5.7,7.1 33.5,7.1 cw(c33.5,6.1) 34.5,6.1 34.5,4.6 77.5,4.6 77.5,32.1 73,32.1 cw(c73,33.1) 72,33.1 72,39.1 6,39.1 6,18.6 cw(c5,18.6) 5,17.6 0,17.6 0,0 ; 1.8,0.7 2,0.7 2,0.3 3.2,0.3 3.2,0.7 3.4,0.7 3.4,1 1.8,1 1.8,0.7 ; 3.124,63.424 5.624,63.424 5.624,59.424 50.624,59.424 50.624,63.424 53.124,63.424 53.124,77.924 3.124,77.924 3.124,63.424 ; 5.65,-13.15 30.35,-13.15 30.35,3.45 5.65,3.45 5.65,-13.15 ; 7,32.1 10.5,32.1 10.5,34.1 7,34.1 7,32.1 ; 7,35.6 10.5,35.6 10.5,37.6 7,37.6 7,35.6 ; 25.1,20.901 42.799,20.901 42.799,36.7 25.1,36.7 25.1,20.901 ; 25.925,21.726 41.974,21.726 41.974,35.875 25.925,35.875 25.925,21.726 ; 40.194,67.424 40.194,74.424 46.194,74.424 46.194,67.424 40.194,67.424 ; 174.233,-157.182 174.233,-139.582 179.233,-139.582 ccw(c179.233,-138.582) 180.233,-138.582 180.233,-118.082 246.233,-118.082 246.233,-124.082 ccw(c247.233,-124.082) 247.233,-125.082 251.733,-125.082 251.733,-152.582 208.733,-152.582 208.733,-151.082 ccw(c207.733,-151.082) 207.733,-150.082 179.933,-150.082 ccw(c179.933,-151.082) 178.933,-151.082 178.933,-157.182 174.233,-157.182 ; 174.933,-154.882 174.933,-152.882 178.433,-152.882 178.433,-154.882 174.933,-154.882 ; 174.933,-152.382 174.933,-150.382 178.433,-150.382 178.433,-152.382 174.933,-152.382 ; 174.933,-149.882 174.933,-147.882 178.433,-147.882 178.433,-149.882 174.933,-149.882 ; 174.933,-147.382 174.933,-145.382 178.433,-145.382 178.433,-147.382 174.933,-147.382 ; 174.933,-144.882 174.933,-142.882 178.433,-142.882 178.433,-144.882 174.933,-144.882 ; 174.933,-142.382 174.933,-140.382 178.433,-140.382 178.433,-142.382 174.933,-142.382 ; 176.033,-156.482 176.033,-156.182 177.633,-156.182 177.633,-156.482 177.433,-156.482 177.433,-156.882 176.233,-156.882 176.233,-156.482 176.033,-156.482 ; 179.883,-170.332 179.883,-153.732 204.583,-153.732 204.583,-170.332 179.883,-170.332 ; 181.233,-125.082 181.233,-123.082 184.733,-123.082 184.733,-125.082 181.233,-125.082 ; 181.233,-121.582 181.233,-119.582 184.733,-119.582 184.733,-121.582 181.233,-121.582 ; 183.033,-135.482 183.033,-127.482 188.433,-127.482 188.433,-135.482 183.033,-135.482 ; 183.833,-134.382 183.833,-128.582 187.233,-128.582 187.233,-131.232 187.933,-131.232 187.933,-131.732 187.233,-131.732 187.233,-134.382 183.833,-134.382 ; 193.791,-116.517 193.791,-98.917 198.791,-98.917 ccw(c198.791,-97.917) 199.791,-97.917 199.791,-77.417 265.791,-77.417 265.791,-83.417 ccw(c266.791,-83.417) 266.791,-84.417 271.291,-84.417 271.291,-111.917 228.291,-111.917 228.291,-110.417 ccw(c227.291,-110.417) 227.291,-109.417 199.491,-109.417 ccw(c199.491,-110.417) 198.491,-110.417 198.491,-116.517 193.791,-116.517 ; 194.491,-114.217 194.491,-112.217 197.991,-112.217 197.991,-114.217 194.491,-114.217 ; 194.491,-111.717 194.491,-109.717 197.991,-109.717 197.991,-111.717 194.491,-111.717 ; 194.491,-109.217 194.491,-107.217 197.991,-107.217 197.991,-109.217 194.491,-109.217 ; 194.491,-106.717 194.491,-104.717 197.991,-104.717 197.991,-106.717 194.491,-106.717 ; 194.491,-104.217 194.491,-102.217 197.991,-102.217 197.991,-104.217 194.491,-104.217 ; 194.491,-101.717 194.491,-99.717 197.991,-99.717 197.991,-101.717 194.491,-101.717 ; 195.591,-115.817 195.591,-115.517 197.191,-115.517 197.191,-115.817 196.991,-115.817 196.991,-116.217 195.791,-116.217 195.791,-115.817 195.591,-115.817 ; 199.333,-136.281 199.333,-120.482 217.032,-120.482 217.032,-136.281 199.333,-136.281 ; 199.441,-129.667 199.441,-113.067 224.141,-113.067 224.141,-129.667 199.441,-129.667 ; 200.158,-135.456 200.158,-121.307 216.207,-121.307 216.207,-135.456 200.158,-135.456 ; 200.791,-84.417 200.791,-82.417 204.291,-82.417 204.291,-84.417 200.791,-84.417 ; 200.791,-80.917 200.791,-78.917 204.291,-78.917 204.291,-80.917 200.791,-80.917 ; 202.591,-94.817 202.591,-86.817 207.991,-86.817 207.991,-94.817 202.591,-94.817 ; 203.391,-93.717 203.391,-87.917 206.791,-87.917 206.791,-90.567 207.491,-90.567 207.491,-91.067 206.791,-91.067 206.791,-93.717 203.391,-93.717 ; 218.891,-95.616 218.891,-79.817 236.59,-79.817 236.59,-95.616 218.891,-95.616 ; 219.716,-94.791 219.716,-80.642 235.765,-80.642 235.765,-94.791 219.716,-94.791 ; 236.158,-125.582 236.933,-125.582 236.933,-126.082 241.033,-126.082 241.033,-125.582 241.808,-125.582 241.808,-123.082 236.158,-123.082 236.158,-125.582 ; 237.038,-124.376 237.238,-124.376 237.238,-124.912 237.313,-124.912 237.313,-124.376 237.513,-124.376 237.513,-124.312 237.038,-124.312 237.038,-124.376 ; 237.613,-124.912 237.688,-124.912 237.688,-124.644 237.913,-124.644 237.976,-124.631 238.026,-124.593 238.063,-124.542 238.076,-124.504 238.076,-124.453 238.063,-124.414 238.026,-124.363 237.976,-124.325 237.913,-124.312 237.613,-124.312 237.613,-124.912 ; 237.688,-124.568 237.926,-124.568 237.963,-124.555 237.988,-124.529 238.001,-124.491 238.001,-124.453 237.988,-124.414 237.963,-124.389 237.926,-124.376 237.688,-124.376 237.688,-124.568 ; 238.776,-124.708 238.776,-124.517 238.788,-124.453 238.813,-124.402 238.863,-124.351 238.913,-124.325 238.976,-124.312 239.088,-124.312 239.151,-124.325 239.201,-124.351 239.251,-124.402 239.263,-124.466 239.188,-124.466 239.176,-124.427 239.138,-124.402 239.088,-124.389 238.976,-124.389 238.926,-124.402 238.888,-124.427 238.863,-124.466 238.851,-124.517 238.851,-124.708 238.863,-124.759 238.888,-124.797 238.926,-124.823 238.976,-124.836 239.088,-124.836 239.138,-124.823 239.176,-124.797 239.188,-124.759 239.263,-124.759 239.251,-124.823 239.201,-124.874 239.151,-124.9 239.088,-124.912 238.976,-124.912 238.913,-124.9 238.863,-124.874 238.813,-124.823 238.788,-124.772 238.776,-124.708 ; 239.363,-124.708 239.363,-124.517 239.376,-124.453 239.401,-124.402 239.451,-124.351 239.501,-124.325 239.563,-124.312 239.663,-124.312 239.726,-124.325 239.776,-124.351 239.826,-124.402 239.851,-124.453 239.863,-124.517 239.863,-124.708 239.851,-124.772 239.826,-124.823 239.776,-124.874 239.726,-124.9 239.663,-124.912 239.563,-124.912 239.501,-124.9 239.451,-124.874 239.401,-124.823 239.376,-124.772 239.363,-124.708 ; 239.438,-124.708 239.438,-124.517 239.451,-124.466 239.476,-124.427 239.513,-124.402 239.563,-124.389 239.663,-124.389 239.713,-124.402 239.751,-124.427 239.776,-124.466 239.788,-124.517 239.788,-124.708 239.776,-124.759 239.751,-124.797 239.713,-124.823 239.663,-124.836 239.563,-124.836 239.513,-124.823 239.476,-124.797 239.451,-124.759 239.438,-124.708 ; 239.963,-124.912 240.038,-124.912 240.038,-124.389 240.351,-124.912 240.463,-124.912 240.463,-124.312 240.388,-124.312 240.388,-124.823 240.076,-124.312 239.963,-124.312 239.963,-124.912 ; 240.563,-124.912 240.638,-124.912 240.638,-124.389 240.951,-124.912 241.063,-124.912 241.063,-124.312 240.988,-124.312 240.988,-124.823 240.676,-124.312 240.563,-124.312 240.563,-124.912 ; 255.716,-84.917 256.491,-84.917 256.491,-85.417 260.591,-85.417 260.591,-84.917 261.366,-84.917 261.366,-82.417 255.716,-82.417 255.716,-84.917 ; 256.596,-83.711 256.796,-83.711 256.796,-84.247 256.871,-84.247 256.871,-83.711 257.071,-83.711 257.071,-83.647 256.596,-83.647 256.596,-83.711 ; 257.171,-84.247 257.246,-84.247 257.246,-83.979 257.471,-83.979 257.534,-83.966 257.584,-83.928 257.621,-83.877 257.634,-83.838 257.634,-83.787 257.621,-83.749 257.584,-83.698 257.534,-83.66 257.471,-83.647 257.171,-83.647 257.171,-84.247 ; 257.246,-83.902 257.484,-83.902 257.521,-83.889 257.546,-83.864 257.559,-83.826 257.559,-83.787 257.546,-83.749 257.521,-83.724 257.484,-83.711 257.246,-83.711 257.246,-83.902 ; 258.334,-84.043 258.334,-83.851 258.346,-83.787 258.371,-83.736 258.421,-83.685 258.471,-83.66 258.534,-83.647 258.646,-83.647 258.709,-83.66 258.759,-83.685 258.809,-83.736 258.821,-83.8 258.746,-83.8 258.734,-83.762 258.696,-83.736 258.646,-83.724 258.534,-83.724 258.484,-83.736 258.446,-83.762 258.421,-83.8 258.409,-83.851 258.409,-84.043 258.421,-84.094 258.446,-84.132 258.484,-84.158 258.534,-84.17 258.646,-84.17 258.696,-84.158 258.734,-84.132 258.746,-84.094 258.821,-84.094 258.809,-84.158 258.759,-84.209 258.709,-84.234 258.646,-84.247 258.534,-84.247 258.471,-84.234 258.421,-84.209 258.371,-84.158 258.346,-84.106 258.334,-84.043 ; 258.921,-84.043 258.921,-83.851 258.934,-83.787 258.959,-83.736 259.009,-83.685 259.059,-83.66 259.121,-83.647 259.221,-83.647 259.284,-83.66 259.334,-83.685 259.384,-83.736 259.409,-83.787 259.421,-83.851 259.421,-84.043 259.409,-84.106 259.384,-84.158 259.334,-84.209 259.284,-84.234 259.221,-84.247 259.121,-84.247 259.059,-84.234 259.009,-84.209 258.959,-84.158 258.934,-84.106 258.921,-84.043 ; 258.996,-84.043 258.996,-83.851 259.009,-83.8 259.034,-83.762 259.071,-83.736 259.121,-83.724 259.221,-83.724 259.271,-83.736 259.309,-83.762 259.334,-83.8 259.346,-83.851 259.346,-84.043 259.334,-84.094 259.309,-84.132 259.271,-84.158 259.221,-84.17 259.121,-84.17 259.071,-84.158 259.034,-84.132 259.009,-84.094 258.996,-84.043 ; 259.521,-84.247 259.596,-84.247 259.596,-83.724 259.909,-84.247 260.021,-84.247 260.021,-83.647 259.946,-83.647 259.946,-84.158 259.634,-83.647 259.521,-83.647 259.521,-84.247 ; 260.121,-84.247 260.196,-84.247 260.196,-83.724 260.509,-84.247 260.621,-84.247 260.621,-83.647 260.546,-83.647 260.546,-84.158 260.234,-83.647 260.121,-83.647 260.121,-84.247
  text "66.00" at 23.505,47.74 h1
  text "34.50" at 85.568,26.355 h1 r90
  text "39.10" at -15.334,18.449 h1 r90
  text "4.70" at -5.499,-11.017 h1
  text "77.50" at 39.98,-20.828 h1
  text "66.00" at 217.296,-68.777 h1
  text "34.50" at 279.36,-90.161 h1 r90
  text "39.10" at 178.458,-98.067 h1 r90
  text "66.00" at 197.738,-109.443 h1
  text "4.70" at 188.293,-127.534 h1
  text "34.50" at 259.802,-130.827 h1 r90
  text "77.50" at 233.771,-137.345 h1
  text "39.10" at 158.9,-138.733 h1 r90
  text "4.70" at 168.735,-168.2 h1
  text "77.50" at 214.213,-178.011 h1

## Other copper
Top Layer:
  rectangle: 38.532,59.487 39.954,62.687
  rectangle: 32.309,59.487 33.731,62.636
  rectangle net SHT_ALERT_S: 25.559,72.746 27.591,77.597
  rectangle net GND_S: 23.059,72.746 25.091,77.597
  rectangle net SHT_SCL_S: 20.559,72.746 22.591,77.597
  rectangle net SHT_SDA_S: 18.059,72.746 20.091,77.597
  rectangle net SHT_SCL: 0.279,4.902 4.47,6.502
  rectangle net SHT_SDA: 0.305,2.591 4.47,4.191
  rectangle net GND: 0.33,7.417 4.953,9.093
  rectangle net SHT_ALERT: 0.33,9.855 5.283,11.633
  rectangle net VBAT: 0.279,12.446 5.944,14.224
  rectangle net VBAT: 22.454,20.65 23.825,21.438
  rectangle net VBAT_CTL_S: 30.554,72.746 32.586,77.597
  rectangle net VBAT_S: 28.059,72.746 30.091,77.597
  pour cut-out: 6,34.671 6,39.1 51.724,39.1 51.74,39.116 51.74,36.678 51.359,36.297 28.232,36.297 26.632,37.897 22.581,37.897 20.86,36.177 13.952,36.177 13.259,35.484 7.747,35.484 7.036,34.773
  region net VBAT_S: 44.275,63.849 42.421,64.646 43.481,65.706
  region net NetD2_1: 37.742,70.39 39.595,69.593 38.535,68.533
  pour cut-out: 25.832,17.831 25.832,16.358 25.679,16.205 24.79,16.205 24.613,16.383 24.613,17.831
  pour cut-out: 15.215,17.78 15.215,16.307 16.18,16.307 16.18,17.78
  pour cut-out: 6,32.893 cw(c6.025,32.893) 6.025,32.918 10.743,32.918 ccw(c10.743,34.393) 11.786,33.35 cw(c13.38,31.756) 13.38,34.011 14.326,34.011 ccw(c14.326,34.379) 14.586,34.118 15.122,34.654 ccw(c14.775,35.001) 15.265,35.001 cw(c15.481,35.001) 15.329,35.154 15.498,35.323 ccw(c15.231,35.056) 15.231,35.433 6.889,35.433 ccw(c6.889,34.132) 5.969,35.052
Bottom Layer:
  rectangle net VBAT: 22.479,20.549 23.825,21.438
  pour cut-out: 5.994,34.666 5.994,39.095 51.718,39.095 51.734,39.111 51.734,36.673 51.353,36.292 28.227,36.292 27.231,37.287 22.987,37.287 21.179,35.479 13.253,35.479 7.741,35.479 7.03,34.768
  pour cut-out: 6,32.893 cw(c6.025,32.893) 6.025,32.918 10.743,32.918 ccw(c10.743,34.393) 11.786,33.35 cw(c13.38,31.756) 13.38,34.011 14.326,34.011 ccw(c14.326,34.379) 14.586,34.118 15.122,34.654 ccw(c14.775,35.001) 15.265,35.001 cw(c15.481,35.001) 15.329,35.154 15.498,35.323 ccw(c15.231,35.056) 15.231,35.433 6.889,35.433 ccw(c6.889,34.132) 5.969,35.052

## Silkscreen, mask and mechanical layers (free items; w line width, h text height)
Top Overlay:
  drawing of 256 lines, arcs and shapes, not listed
  text "CLK" at 5.436,72.695 h0.6
  text "VCC" at 28.143,72.263 h0.6
  text "GND" at 23.317,72.212 h0.6
  text "SDA" at 18.364,72.187 h0.6
  text "SCL" at 20.98,72.111 h0.6
  text "BAT" at 30.963,72.111 h0.6
  text "ALERT" at 26.848,70.129 h0.6 r90
  text "DATA" at 4.978,70.053 h0.6
  text "GND" at 5.258,67.208 h0.6
  text "VCC" at 5.359,64.973 h0.6
  text "VPP" at 5.944,62.103 h0.6
  text "913P002(GYWXWSD)-01" at 53.238,35.179 h1
  text "Date:200608" at 53.264,33.655 h1
  text "BCTX" at 45.034,33.096 h0.6
  text "Ver:F" at 53.315,32.207 h1
  text "GND" at 6.756,27.838 h0.8
  text "BCRX" at 52.299,26.01 h0.6
  text "BAT" at 6.477,22.606 h0.8
  text "GND" at 69.748,18.898 h0.8
  text "B" at 6.985,12.954 h0.5
  text "V" at 6.96,11.836 h0.5
  text "ALERT" at 6.655,10.871 h0.5
  text "VCC" at 69.215,10.338 h0.8
  text "GND" at 6.553,9.804 h0.5
  text "SCL" at 6.502,8.712 h0.5
  text "SDA" at 6.579,7.671 h0.5
  text "VPP" at 63.195,7.442 h0.8 r90
Bottom Overlay:
  circle w0.006: c1.533,91.246 r0.003
  circle w0.006: c1.533,91.246 r0.003
  rectangle: 5.944,62.586 16.231,72.263
  text "913P002(GYWXWSD)-02" at 34.798,66.091 h1
  text "Date:20200608" at 34.773,64.567 h1
  text "Ver:E" at 34.722,63.119 h1
Top Solder:
  region: 44.275,63.849 42.421,64.646 43.481,65.706
  region: 37.742,70.39 39.595,69.593 38.535,68.533

## Text inside footprints (layer, text, board x,y; h text height)
C1: Top Overlay "+" at 21.215,25.956 h0.8 r270
C15: Top Overlay "+" at 49.079,13.507 h0.8 r270
LS1: Bottom Overlay "+             -" at 45.013,62.488 h1 r315